# Altium PCB CNYBoard.PcbDoc
Units mil, origin at the board's own origin, x right, y up, seen from the top; angles counter-clockwise.
Board outline 3858.27 x 393.7 mil, 2 copper layers (Top Layer, Bottom Layer); 35 components, 6 nets, 100 pads, 35 vias.
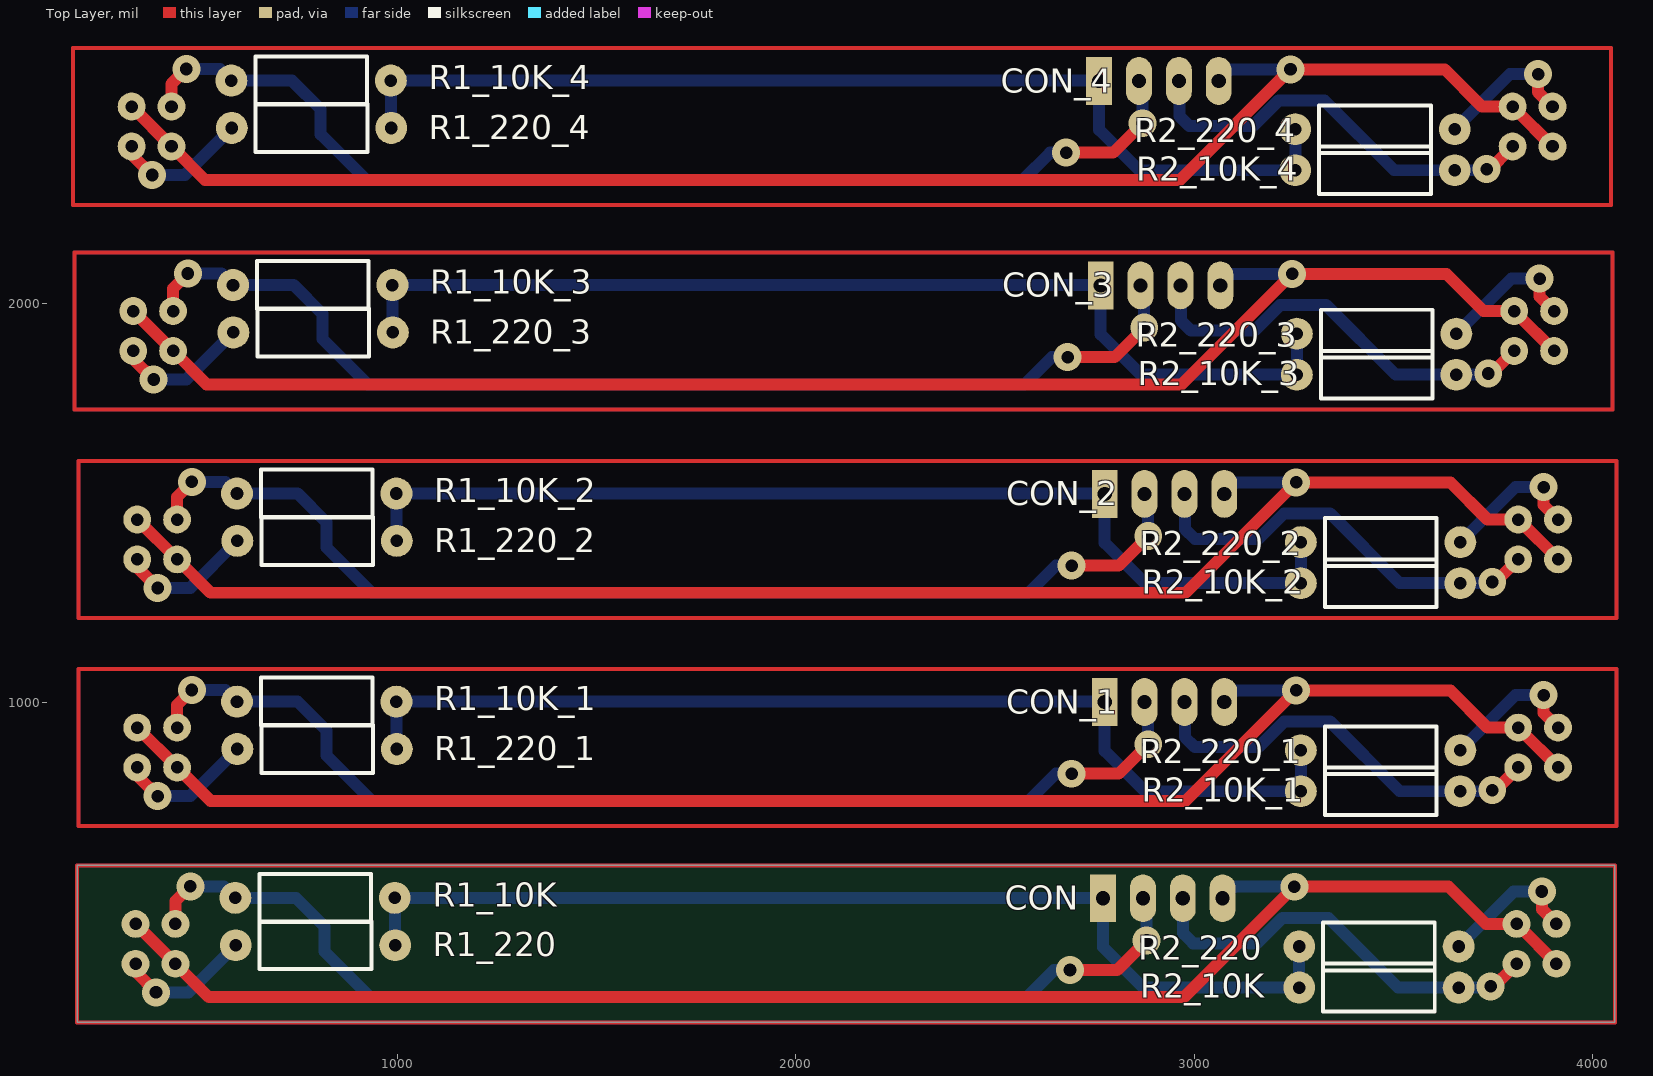
[diagram p0: Top Layer view]
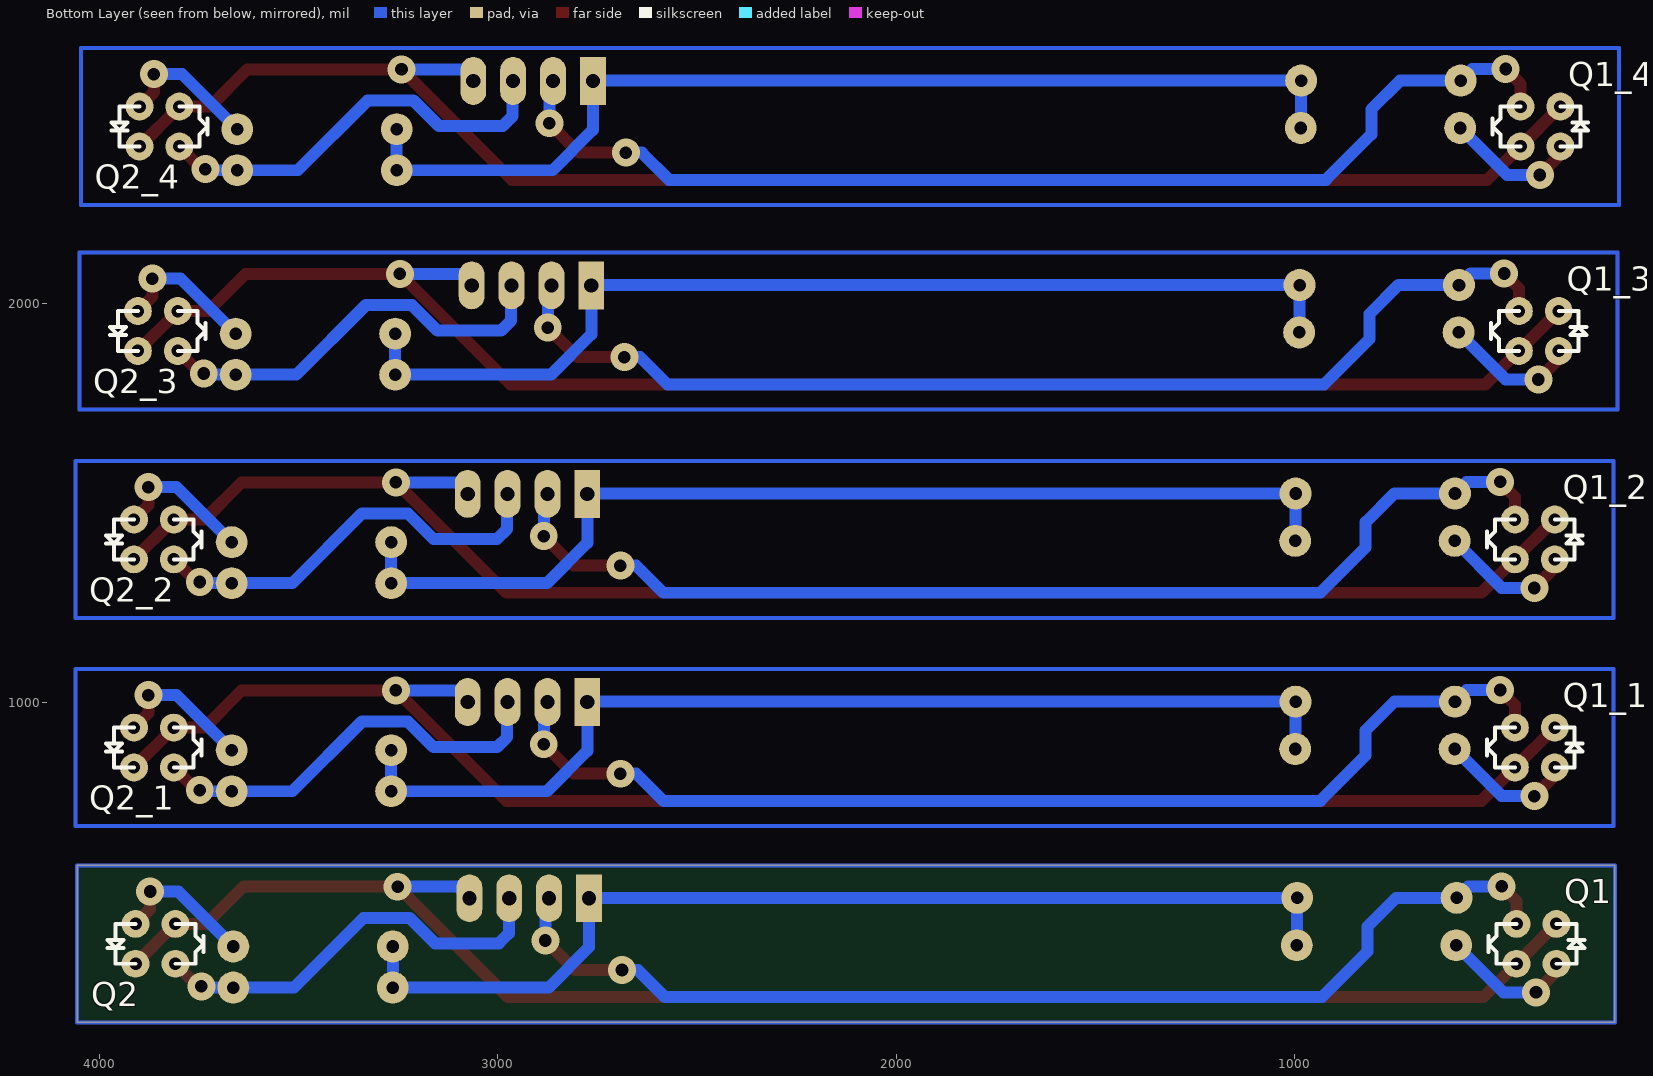
[diagram p1: Bottom Layer view, seen from below]

## Layer stack, top to bottom
Top Solder: solder mask 0.4, Solder Resist, Dk 3.5
Top Layer: signal copper 1.4
Dielectric 1: dielectric 12.6, FR-4, Dk 4.8
Bottom Layer: signal copper 1.4
Bottom Solder: solder mask 0.4, Solder Resist, Dk 3.5

## Board outline
196.85,196.85 196.85,590.55 4055.12,590.55 4055.12,196.85

## Design rules (kind name [scope] priority, off if disabled: settings)
Clearance [All] p1: gap=10 ignorepadtopadclearanceinfootprint=FALSE except(0: Arc-Hole Track-Hole SMDPad-Hole THPad-Hole Via-Hole Fill-Hole Poly-Hole Region-Hole Text-Hole)
PolygonConnect [All] p1: connectstyle=Relief reliefconductorwidth=10 reliefentries=4 polygonreliefangle="90 Angle" airgapwidth=10
RoutingVias [All] p1: holewidth=28 width=50 viastyle="Through Hole" minholewidth=28 minwidth=50 maxholewidth=28 maxwidth=50
SolderMaskExpansion [All] p1: expansion=4
Width [All] p1: maxlimit=30 minlimit=30 preferedwidth=30
30 further rules are at their usual default settings.

## Classes and differential pairs
component class CNYBoard: CON Q1 Q2 R1_10K R1_220 R2_10K R2_220

## Components (designator, comment, footprint, x,y, rotation, side; value= is the part's Value field where it differs from the comment)
CON "HEADER-4" HEADER-4-VERTICAL 2770.87,508 r90 top
CON_1 "HEADER-4" HEADER-4-VERTICAL 2775.02,1000.45 r90 top (schematic designator CON)
CON_2 "HEADER-4" HEADER-4-VERTICAL 2775.02,1522.45 r90 top (schematic designator CON)
CON_3 "HEADER-4" HEADER-4-VERTICAL 2765.02,2045.45 r90 top (schematic designator CON)
CON_4 "HEADER-4" HEADER-4-VERTICAL 2761.02,2558.45 r90 top (schematic designator CON)
Q1 "CNY70" CNY70_LIB 393.7,393.7 r0 bottom
Q1_1 "CNY70" CNY70_LIB 397.85,886.15 r0 bottom (schematic designator Q1)
Q1_2 "CNY70" CNY70_LIB 397.85,1408.15 r0 bottom (schematic designator Q1)
Q1_3 "CNY70" CNY70_LIB 387.85,1931.15 r0 bottom (schematic designator Q1)
Q1_4 "CNY70" CNY70_LIB 383.85,2444.15 r0 bottom (schematic designator Q1)
Q2 "CNY70" CNY70_LIB 3858.27,393.7 r180 bottom
Q2_1 "CNY70" CNY70_LIB 3862.42,886.15 r180 bottom (schematic designator Q2)
Q2_2 "CNY70" CNY70_LIB 3862.42,1408.15 r180 bottom (schematic designator Q2)
Q2_3 "CNY70" CNY70_LIB 3852.42,1931.15 r180 bottom (schematic designator Q2)
Q2_4 "CNY70" CNY70_LIB 3848.42,2444.15 r180 bottom (schematic designator Q2)
R1_10K "RES" RES-Axial-400mil 994,509 r180 top value=10K
R1_10K_1 "RES" RES-Axial-400mil 998.15,1001.45 r180 top value=10K (schematic designator R1_10K)
R1_10K_2 "RES" RES-Axial-400mil 998.15,1523.45 r180 top value=10K (schematic designator R1_10K)
R1_10K_3 "RES" RES-Axial-400mil 988.15,2046.45 r180 top value=10K (schematic designator R1_10K)
R1_10K_4 "RES" RES-Axial-400mil 984.15,2559.45 r180 top value=10K (schematic designator R1_10K)
R1_220 "RES" RES-Axial-400mil 995,390 r180 top value=220
R1_220_1 "RES" RES-Axial-400mil 999.15,882.45 r180 top value=220 (schematic designator R1_220)
R1_220_2 "RES" RES-Axial-400mil 999.15,1404.45 r180 top value=220 (schematic designator R1_220)
R1_220_3 "RES" RES-Axial-400mil 989.15,1927.45 r180 top value=220 (schematic designator R1_220)
R1_220_4 "RES" RES-Axial-400mil 985.15,2440.45 r180 top value=220 (schematic designator R1_220)
R2_10K "RES" RES-Axial-400mil 3263,284 r0 top value=10K
R2_10K_1 "RES" RES-Axial-400mil 3267.15,776.45 r0 top value=10K (schematic designator R2_10K)
R2_10K_2 "RES" RES-Axial-400mil 3267.15,1298.45 r0 top value=10K (schematic designator R2_10K)
R2_10K_3 "RES" RES-Axial-400mil 3257.15,1821.45 r0 top value=10K (schematic designator R2_10K)
R2_10K_4 "RES" RES-Axial-400mil 3253.15,2334.45 r0 top value=10K (schematic designator R2_10K)
R2_220 "RES" RES-Axial-400mil 3263,387 r0 top value=220
R2_220_1 "RES" RES-Axial-400mil 3267.15,879.45 r0 top value=220 (schematic designator R2_220)
R2_220_2 "RES" RES-Axial-400mil 3267.15,1401.45 r0 top value=220 (schematic designator R2_220)
R2_220_3 "RES" RES-Axial-400mil 3257.15,1924.45 r0 top value=220 (schematic designator R2_220)
R2_220_4 "RES" RES-Axial-400mil 3253.15,2437.45 r0 top value=220 (schematic designator R2_220)

## Footprints (in the part's own frame and the unit in brackets; to place one, negate y for a bottom-side part, rotate by r counter-clockwise, add the part's x,y. Pads: shape width x height; smd on the part's side, far side on the other; paste and mask are expansions set on the pad)
CNY70_LIB [mil]
  round 70 hole 31.5: A(-50,50) C(50,-50) E(50,50) K(-50,-50)
  silkscreen extent -120,-50 120,50
HEADER-4-VERTICAL [mil]
  rect 120x65 hole 35.43: 1(0,0)
  oval 120x65 hole 35.43: 2(0,-100) 3(0,-200) 4(0,-300)
  body extent -49,-350 49,50, height 336
RES-Axial-400mil [mil]
  round 80 hole 31.5: 1(0,0) 2(400,0)
  silkscreen extent 60,-60 340,60, body extent -12,-44 410,44, height 94

## Via types
v1: diameter 70, hole 31.5, Top Layer to Bottom Layer, 35 vias

## Nets (pads, with @x,y where several pads share a name; then routed paths per layer and width w, separated by ;. In a path a pad name is that pad's centre, name@x,y a point inside that pad or via, vN(x,y) a via of type N, cw(c..) or ccw(c..) an arc to the next point about the centre after c; other vN are vias at no path point)
GND: CON.4 Q1.E Q1.K Q2.E Q2.K | length 4062.3
  Top Layer w30: Q1.K@338.58,448.82 Q1.E@448.82,338.58 ; Q1.E 527.4,260 2974,260 v1(3251,537) 3638,537 3731.3,443.7 Q2.E ; Q2.E@3803.15,448.82 Q2.E ; Q2.K@3913.39,338.58 Q2.E
  Bottom Layer w30: CON.4@3066,510 3068,508 CON.4 3099.87,537 v1(3251,537)
NetQ1_A: Q1.A R1_220.2 | length 341.8
  Top Layer w30: Q1.A 343.7,323.3 v1(395,272)
  Bottom Layer w30: v1(395,272) 477,272 R1_220.2
NetQ2_A: Q2.A R2_220.2 | length 362.5
  Top Layer w30: v1(3872,525) 3872,479.97 Q2.A
  Bottom Layer w30: R2_220.2 3801,525 v1(3872,525)
OUT1: CON.2 Q1.C R1_10K.2 | length 2829.4
  Top Layer w30: Q1.C 443.7,500.7 v1(481,538) ; v1(2688,328) 2806,328 v1(2880,402)
  Bottom Layer w30: v1(481,538) 565,538 R1_10K.2 746,509 818,437 818,374 932,260 2580,260 2648,328 v1(2688,328) ; CON.2 2880,498.87 v1(2880,402)
OUT2: CON.3 Q2.C R2_10K.2 | length 1072.9
  Top Layer w30: v1(3743,287) 3743,278.43 Q2.C
  Bottom Layer w30: CON.3@2966,508 2972,502 2972,420 2997,395 3157,395 3221,459 3336,459 3511,284 R2_10K.2 3740,284 v1(3743,287)
VCC: CON.1 R1_10K.1 R1_220.1 R2_10K.1 R2_220.1 | length 2656.6
  Bottom Layer w30: R1_220.1 994,391 R1_10K.1 2769.87,509 CON.1 2770.87,385.13 2872,284 R2_10K.1 R2_220.1
pads on no net: CON_1.1 CON_1.2 CON_1.3 CON_1.4 CON_2.1 CON_2.2 CON_2.3 CON_2.4 CON_3.1 CON_3.2 CON_3.3 CON_3.4 CON_4.1 CON_4.2 CON_4.3 CON_4.4 Q1_1.A Q1_1.C Q1_1.E Q1_1.K Q1_2.A Q1_2.C Q1_2.E Q1_2.K Q1_3.A Q1_3.C Q1_3.E Q1_3.K Q1_4.A Q1_4.C Q1_4.E Q1_4.K Q2_1.A Q2_1.C Q2_1.E Q2_1.K Q2_2.A Q2_2.C Q2_2.E Q2_2.K Q2_3.A Q2_3.C Q2_3.E Q2_3.K Q2_4.A Q2_4.C Q2_4.E Q2_4.K R1_10K_1.1 R1_10K_1.2 R1_10K_2.1 R1_10K_2.2 R1_10K_3.1 R1_10K_3.2 R1_10K_4.1 R1_10K_4.2 R1_220_1.1 R1_220_1.2 R1_220_2.1 R1_220_2.2 R1_220_3.1 R1_220_3.2 R1_220_4.1 R1_220_4.2 R2_10K_1.1 R2_10K_1.2 R2_10K_2.1 R2_10K_2.2 R2_10K_3.1 R2_10K_3.2 R2_10K_4.1 R2_10K_4.2 R2_220_1.1 R2_220_1.2 R2_220_2.1 R2_220_2.2 R2_220_3.1 R2_220_3.2 R2_220_4.1 R2_220_4.2
copper on no net: | length 45302
  Top Layer w30: 328.73,2499.27 438.97,2389.03 ; 332.73,1986.27 442.97,1876.03 ; 333.85,2394.15 333.85,2373.75 v1(385.15,2322.45) ; 337.85,1881.15 337.85,1860.75 v1(389.15,1809.45) ; 342.73,941.27 452.97,831.03 ; 342.73,1463.27 452.97,1353.03 ; 347.85,836.15 347.85,815.75 v1(399.15,764.45) ; 347.85,1358.15 347.85,1337.75 v1(399.15,1286.45) ; 433.85,2394.15 517.55,2310.45 2964.15,2310.45 v1(3241.15,2587.45) 3628.15,2587.45 3721.45,2494.15 3798.42,2494.15 ; 433.85,2494.15 433.85,2551.15 v1(471.15,2588.45) ; 437.85,1881.15 521.55,1797.45 2968.15,1797.45 v1(3245.15,2074.45) 3632.15,2074.45 3725.45,1981.15 3802.42,1981.15 ; 437.85,1981.15 437.85,2038.15 v1(475.15,2075.45) ; 447.85,836.15 531.55,752.45 2978.15,752.45 v1(3255.15,1029.45) 3642.15,1029.45 3735.45,936.15 3812.42,936.15 ; 447.85,936.15 447.85,993.15 v1(485.15,1030.45) ; 447.85,1358.15 531.55,1274.45 2978.15,1274.45 v1(3255.15,1551.45) 3642.15,1551.45 3735.45,1458.15 3812.42,1458.15 ; 447.85,1458.15 447.85,1515.15 v1(485.15,1552.45) ; v1(2678.15,2378.45) 2796.15,2378.45 v1(2870.15,2452.45) ; v1(2682.15,1865.45) 2800.15,1865.45 v1(2874.15,1939.45) ; v1(2692.15,820.45) 2810.15,820.45 v1(2884.15,894.45) ; v1(2692.15,1342.45) 2810.15,1342.45 v1(2884.15,1416.45) ; v1(3733.15,2337.45) 3733.15,2328.88 3798.42,2394.15 ; v1(3737.15,1824.45) 3737.15,1815.88 3802.42,1881.15 ; v1(3747.15,779.45) 3747.15,770.88 3812.42,836.15 ; v1(3747.15,1301.45) 3747.15,1292.88 3812.42,1358.15 ; 3793.3,2499.27 3798.42,2494.15 ; 3797.3,1986.27 3802.42,1981.15 ; 3807.3,941.27 3812.42,936.15 ; 3807.3,1463.27 3812.42,1458.15 ; v1(3862.15,2575.45) 3862.15,2530.42 3898.42,2494.15 ; v1(3866.15,2062.45) 3866.15,2017.42 3902.42,1981.15 ; v1(3876.15,1017.45) 3876.15,972.42 3912.42,936.15 ; v1(3876.15,1539.45) 3876.15,1494.42 3912.42,1458.15 ; 3903.54,2389.03 3798.42,2494.15 ; 3907.54,1876.03 3802.42,1981.15 ; 3917.54,831.03 3812.42,936.15 ; 3917.54,1353.03 3812.42,1458.15
  Bottom Layer w30: v1(385.15,2322.45) 467.15,2322.45 585.15,2440.45 ; v1(389.15,1809.45) 471.15,1809.45 589.15,1927.45 ; v1(399.15,764.45) 481.15,764.45 599.15,882.45 ; v1(399.15,1286.45) 481.15,1286.45 599.15,1404.45 ; v1(471.15,2588.45) 555.15,2588.45 584.15,2559.45 736.15,2559.45 808.15,2487.45 808.15,2424.45 922.15,2310.45 2570.15,2310.45 2638.15,2378.45 v1(2678.15,2378.45) ; v1(475.15,2075.45) 559.15,2075.45 588.15,2046.45 740.15,2046.45 812.15,1974.45 812.15,1911.45 926.15,1797.45 2574.15,1797.45 2642.15,1865.45 v1(2682.15,1865.45) ; v1(485.15,1030.45) 569.15,1030.45 598.15,1001.45 750.15,1001.45 822.15,929.45 822.15,866.45 936.15,752.45 2584.15,752.45 2652.15,820.45 v1(2692.15,820.45) ; v1(485.15,1552.45) 569.15,1552.45 598.15,1523.45 750.15,1523.45 822.15,1451.45 822.15,1388.45 936.15,1274.45 2584.15,1274.45 2652.15,1342.45 v1(2692.15,1342.45) ; 985.15,2440.45 984.15,2441.45 984.15,2559.45 2760.02,2559.45 2761.02,2558.45 2761.02,2435.58 2862.15,2334.45 3253.15,2334.45 3253.15,2437.45 ; 989.15,1927.45 988.15,1928.45 988.15,2046.45 2764.02,2046.45 2765.02,2045.45 2765.02,1922.58 2866.15,1821.45 3257.15,1821.45 3257.15,1924.45 ; 999.15,882.45 998.15,883.45 998.15,1001.45 2774.02,1001.45 2775.02,1000.45 2775.02,877.58 2876.15,776.45 3267.15,776.45 3267.15,879.45 ; 999.15,1404.45 998.15,1405.45 998.15,1523.45 2774.02,1523.45 2775.02,1522.45 2775.02,1399.58 2876.15,1298.45 3267.15,1298.45 3267.15,1401.45 ; 2861.02,2558.45 2870.15,2549.32 v1(2870.15,2452.45) ; 2865.02,2045.45 2874.15,2036.32 v1(2874.15,1939.45) ; 2875.02,1000.45 2884.15,991.32 v1(2884.15,894.45) ; 2875.02,1522.45 2884.15,1513.32 v1(2884.15,1416.45) ; 2956.15,2558.45 2962.15,2552.45 2962.15,2470.45 2987.15,2445.45 3147.15,2445.45 3211.15,2509.45 3326.15,2509.45 3501.15,2334.45 3653.15,2334.45 3730.15,2334.45 v1(3733.15,2337.45) ; 2960.15,2045.45 2966.15,2039.45 2966.15,1957.45 2991.15,1932.45 3151.15,1932.45 3215.15,1996.45 3330.15,1996.45 3505.15,1821.45 3657.15,1821.45 3734.15,1821.45 v1(3737.15,1824.45) ; 2970.15,1000.45 2976.15,994.45 2976.15,912.45 3001.15,887.45 3161.15,887.45 3225.15,951.45 3340.15,951.45 3515.15,776.45 3667.15,776.45 3744.15,776.45 v1(3747.15,779.45) ; 2970.15,1522.45 2976.15,1516.45 2976.15,1434.45 3001.15,1409.45 3161.15,1409.45 3225.15,1473.45 3340.15,1473.45 3515.15,1298.45 3667.15,1298.45 3744.15,1298.45 v1(3747.15,1301.45) ; 3056.15,2560.45 3058.15,2558.45 3061.02,2558.45 3090.02,2587.45 v1(3241.15,2587.45) ; 3060.15,2047.45 3062.15,2045.45 3065.02,2045.45 3094.02,2074.45 v1(3245.15,2074.45) ; 3070.15,1002.45 3072.15,1000.45 3075.02,1000.45 3104.02,1029.45 v1(3255.15,1029.45) ; 3070.15,1524.45 3072.15,1522.45 3075.02,1522.45 3104.02,1551.45 v1(3255.15,1551.45) ; 3653.15,2437.45 3791.15,2575.45 v1(3862.15,2575.45) ; 3657.15,1924.45 3795.15,2062.45 v1(3866.15,2062.45) ; 3667.15,879.45 3805.15,1017.45 v1(3876.15,1017.45) ; 3667.15,1401.45 3805.15,1539.45 v1(3876.15,1539.45)

## Other copper
Multi-Layer:
  lines w10: 187,2247.3 187,2641 4045.27,2641 4045.27,2247.3 187,2247.3 ; 191,1734.3 191,2128 4049.27,2128 4049.27,1734.3 191,1734.3 ; 196.85,196.85 4055.12,196.85 4055.12,590.55 196.85,590.55 196.85,196.85 ; 201,689.3 201,1083 4059.27,1083 4059.27,689.3 201,689.3 ; 201,1211.3 201,1605 4059.27,1605 4059.27,1211.3 201,1211.3